# EAGLE board riffle-0.2 (EAGLE 7.2.0)

Size 102.67 x 18.03 mm. Coordinates in mm from the lower left corner, seen from the top.
Outline: 102.27,18.01 0,18.03 0,0.02 102.67,0
Copper layers (1*16): Top 0.035mm / dielectric 1.5mm / Bottom 0.035mm
Design rules "Fusion_eagle_rule_v1.1 *": minimum track width 6mil, minimum drill 12mil, track to track 6mil, track to pad 6mil, pad to pad 6mil, via to via 6mil, smd to smd 0mil, copper to edge 10mil, drill to drill 10mil, minimum pad ring 10mil, minimum via ring 6mil, stop-mask expansion 2mil, vias tented up to drill 100mil, thermal gap 25mil
Net classes: 0 default: width 0.203 mm, drill 0.33 mm, clearance 0.203 mm; 1 power: width 0.381 mm, drill 0.33 mm, clearance 0.254 mm

## Footprints (pad centres in the part's own frame; a part is rotated, then mirrored left to right if it is on the bottom)
BATTCON_12MM_SMT = smd 2.4 x 4.3: P$1 0,11.96 | smd 2.4 x 4.2: P$2 0,-4.1 | hole 0.95: 0,7.5 | hole 1.25: 0,0
C0805K = smd 1.1 x 1.4: 1 -1,0; 2 1,0
C0805 = smd 1.3 x 1.5: 1 -0.85,0; 2 0.85,0
C0805@1 = smd 1.3 x 1.5: 1 -0.95,0; 2 0.95,0
CHIPLED_0805 = smd 1.2 x 1.2: A 0,-1.05; C 0,1.05
JST-PH-2-SMT-RA = smd 1 x 4.6: 1 1,-3.7; 2 -1,-3.7 | smd 1.6 x 3.4: NC1 -3.4,1.5; NC2 3.4,1.5
R0805 = smd 1.3 x 1.5: 1 -0.95,0; 2 0.95,0
TQFP32-08 = smd 1.27 x 0.559: 1 -4.293,2.8; 2 -4.293,2; 3 -4.293,1.2; 4 -4.293,0.4; 5 -4.293,-0.4; 6 -4.293,-1.2; 7 -4.293,-2; 8 -4.293,-2.8; 17 4.293,-2.8; 18 4.293,-2; 19 4.293,-1.2; 20 4.293,-0.4; 21 4.293,0.4; 22 4.293,1.2; 23 4.293,2; 24 4.293,2.8 | smd 0.559 x 1.27: 9 -2.8,-4.293; 10 -2,-4.293; 11 -1.2,-4.293; 12 -0.4,-4.293; 13 0.4,-4.293; 14 1.2,-4.293; 15 2,-4.293; 16 2.8,-4.293; 25 2.8,4.293; 26 2,4.293; 27 1.2,4.293; 28 0.4,4.293; 29 -0.4,4.293; 30 -1.2,4.293; 31 -2,4.293; 32 -2.8,4.293
SOT23-5 = smd 0.55 x 1.2: 1 -0.95,-1.3; 2 0,-1.3; 3 0.95,-1.3; 4 0.95,1.3; 5 -0.95,1.3; 6 0,1.3
SO16 = smd 0.6 x 1.2: 1 -4.445,-2.8; 2 -3.175,-2.8; 3 -1.905,-2.8; 4 -0.635,-2.8; 5 0.635,-2.8; 6 1.905,-2.8; 7 3.175,-2.8; 8 4.445,-2.8; 9 4.445,2.8; 10 3.175,2.8; 11 1.905,2.8; 12 0.635,2.8; 13 -0.635,2.8; 14 -1.905,2.8; 15 -3.175,2.8; 16 -4.445,2.8
SOT89 = smd 0.58 x 1.2: 1 -1.5,-1.8; 2 0,-1.8; 3 1.5,-1.8 | smd 2 x 2: 4 0,1.3
SO-08 = smd 0.6 x 2.2: 1 -1.905,-2.6; 2 -0.635,-2.6; 3 0.635,-2.6; 4 1.905,-2.6; 5 1.905,2.6; 6 0.635,2.6; 7 -0.635,2.6; 8 -1.905,2.6
2X03 = drill 1.016 octagon: 1 -2.54,-1.27; 2 -2.54,1.27; 3 0,-1.27; 4 0,1.27; 5 2.54,-1.27; 6 2.54,1.27
AYZ0202 = smd 1 x 1.15: 1 -2.5,2.825; 2 0,2.825; 3 2.5,2.825; 4 -2.5,-2.825; 5 0,-2.825; 6 2.5,-2.825 | hole 0.85: 1.5,0; -1.5,0
1X02 = drill 1.016 long: 1 -1.27,0; 2 1.27,0
1X07 = drill 1.016 pad 1.88: 1 0,0; 2 2.54,0; 3 5.08,0; 4 7.62,0; 5 10.16,0; 6 12.7,0; 7 15.24,0
MICRO-SD-SOCKET-TAOBAO = smd 0.75 x 1.6: 1 2.25,10.5; 2 1.15,10.5; 3 0.05,10.5; 4 -1.05,10.5; 5 -2.15,10.5; 6 -3.25,10.5; 7 -4.35,10.5; 8 -5.45,10.5 | smd 0.7 x 1.6: CD -6.55,10.5 | smd 1.2 x 1.5: GND1 -7.75,9.8 | smd 1.6 x 1.4: GND3 6.85,10 | smd 1.2 x 2.2: P$1 7.75,0.4; P$2 -7.75,0.4 | hole 1: 3.05,0; -4.93,0
R0805' = smd 1.1 x 1.4: 1 -1,0; 2 1,0
SOT-23 = smd 0.787 x 0.889: 1 0.025,-1.016; 2 -0.94,1.016; 3 0.991,1.016
EXB38V = smd 0.6 x 0.8: 1 -1.275,-0.75; 4 1.275,-0.75; 5 1.275,0.75; 8 -1.275,0.75 | smd 0.5 x 0.8: 2 -0.4,-0.75; 3 0.4,-0.75; 6 0.4,0.75; 7 -0.4,0.75
R0603 = smd 1 x 1.1: 1 -0.85,0; 2 0.85,0
DS3231 = smd 0.762 x 2.286: 1 -4.445,-5.08; 2 -3.175,-5.08; 3 -1.905,-5.08; 4 -0.635,-5.08; 5 0.635,-5.08; 6 1.905,-5.08; 7 3.175,-5.08; 8 4.445,-5.08; 9 4.445,5.08; 10 3.175,5.08; 11 1.905,5.08; 12 0.635,5.08; 13 -0.635,5.08; 14 -1.905,5.08; 15 -3.175,5.08; 16 -4.445,5.08
RFM12B-ANTENNA = drill 0.8 pad 1.422: P$1 0,0
RFM69W-MINPADS = smd 2 x 1.27: ANA 8,-5; DIO0 -11.5,5; GND 8,-7; MISO 8,1; MOSI 8,3; NSS 8,5; SCK 8,-1; VDD -11.5,-7
USB-MINIB = smd 2.5 x 0.5: D+ 2.5,0; D- 2.5,0.8; GND 2.5,-1.6; ID 2.5,-0.8; VBUS 2.5,1.6 | smd 2.5 x 2: GND@1 -3,-4.5; GND@2 -3,4.5; GND@3 2.5,4.5; GND@4 2.5,-4.5 | hole 0.9: 0,2.2; 0,-2.2
RESONATOR-SMD = smd 0.7 x 1.7: 1 -1.2,0; 2 0,0; 3 1.2,0

## Placement (x,y rotation side)
BAT  CR1220  [BATTCON_12MM_SMT]  54.89,9.42 110 top
C1  10u  [C0805K]  27.19,1.52 0 top
C2  10u  [C0805K]  58.99,1.32 180 top
C3  10u  [C0805K]  44.79,15.82 270 top
C4  0.1uF  [C0805K]  17.49,4.52 180 top
C5  0.1uF  [C0805K]  22.19,4.42 0 top
C6  0.1u  [C0805K]  59.59,15.62 90 top
C7  0.1u  [C0805K]  32.09,1.42 180 top
C8  .1u  [C0805]  80.69,5.52 90 top
C9  .1uF  [C0805@1]  21.69,1.62 0 top
CHG  0805  [CHIPLED_0805]  43.29,1.42 270 top
CN1  [JST-PH-2-SMT-RA]  3.99,4.82 90 top
I2C1  10K  [R0805]  18.59,7.02 180 top
I2C2  10K  [R0805]  13.29,4.52 0 top
IC1  ATMEGA328P  [TQFP32-08]  38.19,12.32 90 top
IC2  MCP73831  [SOT23-5]  32.99,4.62 270 top
IC3  CH340G  [SO16]  28.09,12.02 90 top
IC4  MCP1700-33  [SOT89]  37.89,3.22 0 top
IC5  24AA128SN  [SO-08]  64.79,13.42 180 top
ISP  [2X03]  64.79,4.42 90 top
J1  AYZ0202  [AYZ0202]  7.79,13.52 90 top
JP1  [1X02]  1.89,13.62 90 top
JP4  [1X07]  100.49,1.22 90 top
MICROSD  [MICRO-SD-SOCKET-TAOBAO]  90.09,11.72 180 top
RC  4.7K  [R0805']  48.39,16.82 0 top
REMOTE  FDN340P  [SOT-23]  80.29,15.62 90 top
RM1  10K  [R0805]  12.89,1.52 0 top
RM2  10K  [R0805]  16.89,1.62 0 top
RN1  [EXB38V]  74.99,16.02 0 top
RRST  10k  [R0805']  22.49,6.52 0 top
RSD  10K  [R0603]  69.69,16.52 0 top
RTC  DS3231  [DS3231]  73.49,7.02 180 top
U$3  RFM12B_ANTENNA  [RFM12B-ANTENNA]  51.99,15.42 0 top
U$5  RFM69  [RFM69W-MINPADS]  82.09,9.52 0 bottom
X1  USBSMD  [USB-MINIB]  17.99,12.52 270 top
X2  12MHz  [RESONATOR-SMD]  28.19,4.62 0 top
X3  16 MHz  [RESONATOR-SMD]  13.29,6.92 0 top

## Library data of the parts
BAT IC2 IC3 J1 MICROSD X2 = SparkFunNew
C1-C5 RC RRST RSD = adafruit2013
C6 C7 CN1 IC4 = adafruit
C8 = resistor
C9 I2C1 I2C2 RM1 RM2 = rcl
CHG = led
IC1 = atmel; MPN: ATMEGA8-16AU; OC_FARNELL: 9171371; OC_NEWARK: 73M8863
IC5 = microchip; MF: MICROCHIP; MPN: 24AA128-I/SN; OC_FARNELL: unknown; OC_NEWARK: 92C6842
ISP JP1 = pinhead
JP4 = SparkFun-Connectors
REMOTE = zetex
RN1 = resistor-dil; OC_FARNELL: unknown; OC_NEWARK: unknown
RTC = _lh-library
U$3 U$5 = LowPowerLab
X1 X3 = SparkFun

## Nets
A0: IC1.23 JP4.2
A1: IC1.24 JP4.3
A2: IC1.25
A3: C9.2 IC1.26 RM1.1 RM2.2
A4: IC1.27 IC5.5
A5: IC1.28 IC5.6
A6: IC1.19
A7: IC1.22
AREF: C5.2 IC1.20
D0: MICROSD.2 RSD.1
D2: IC1.32 JP4.4 U$5.DIO0
D3: IC1.1
D4: IC1.2 REMOTE.3
D5: IC1.9
D6: IC1.10
D7: IC1.11
D8: IC1.12
D9: IC1.13
D10: IC1.14
D10_SS: U$5.NSS
D11_MOSI: U$5.MOSI
D12_MISO: U$5.MISO
D13_SCK: U$5.SCK
D+: IC3.5 X1.D+
D-: IC3.6 X1.D-
GND: BAT.P$1 C1.2 C2.2 C3.2 C4.1 C5.1 C6.2 C8.1 C9.1 CN1.2 IC1.3 IC1.5 IC1.21 IC2.2 IC3.1 IC4.1 IC5.1 IC5.2 IC5.3 IC5.4 IC5.7 ISP.6 JP4.1 MICROSD.6 MICROSD.GND1 MICROSD.GND3 MICROSD.P$1 MICROSD.P$2 RC.1 RM2.1 RTC.5 RTC.6 RTC.7 RTC.8 RTC.9 RTC.10 RTC.11 RTC.12 RTC.13 U$5.GND X1.GND X2.2 X3.2
MISO: IC1.16 ISP.1 MICROSD.7
MOSI: IC1.15 ISP.4 MICROSD.3
N$1: U$3.P$1 U$5.ANA
N$2: IC1.7 X3.1
N$3: IC1.8 X3.3
N$5: CHG.C IC2.1
N$6: IC2.5 RC.2
N$7: C8.2 JP4.7 REMOTE.1
N$10: CHG.A RN1.4
N$11: IC3.7 X2.1
N$13: IC3.8 X2.3
RESET: C7.1 IC1.29 ISP.5 RRST.1
RST: C7.2 IC3.14
RTC_BATT: BAT.P$2 RTC.14
RXD: IC1.30 IC3.2
SCK: IC1.17 ISP.3 MICROSD.5
SCL: I2C1.2 JP4.6 RTC.16
SDA: I2C2.2 JP4.5 RTC.15
TXD: IC1.31 IC3.3
VBAT [power]: CN1.1 IC2.3 J1.2
VBUS [power]: C1.1 IC2.4 ISP.2 RN1.5 X1.VBUS
VCC: C3.1 C4.2 C6.1 I2C1.1 I2C2.1 IC1.4 IC1.6 IC1.18 IC3.4 IC3.16 IC4.3 IC5.8 MICROSD.4 REMOTE.2 RRST.2 RSD.2 RTC.2 U$5.VDD
VDD: C2.1 IC4.2 J1.1
VIN [power]: RM1.2

## Tracks (layer width: path | path; a pad name or v marks a point on that pad's centre or on a via)
A0  (1 unrouted)
A1  (1 unrouted)
A3  (3 unrouted)
A4  (1 unrouted)
A5  (1 unrouted)
AREF  (1 unrouted)
D0  (1 unrouted)
D2  (2 unrouted)
D4  (1 unrouted)
D+  (1 unrouted)
D-  (1 unrouted)
GND  (42 unrouted)
MISO  (2 unrouted)
MOSI  (2 unrouted)
N$1  (1 unrouted)
N$2  (1 unrouted)
N$3  (1 unrouted)
N$5  (1 unrouted)
N$6  (1 unrouted)
N$7  (2 unrouted)
N$10  (1 unrouted)
N$11  (1 unrouted)
N$13  (1 unrouted)
RESET  (3 unrouted)
RST  (1 unrouted)
RTC_BATT  (1 unrouted)
RXD  (1 unrouted)
SCK  (2 unrouted)
SCL  (2 unrouted)
SDA  (2 unrouted)
TXD  (1 unrouted)
VBAT  (2 unrouted)
VBUS  (4 unrouted)
VCC  (17 unrouted)
VDD  (2 unrouted)

## Text on the board
tNames: D2 D5 A6 A7 | GND D7 D11 VCC | SDA SCL GND VCC | On | VBAT